# Altium PCB PCB.PcbDoc
Units mm, origin at the board's own origin, x right, y up, seen from the top; angles counter-clockwise.
Board outline 152.4 x 101.6 mm, 4 copper layers (Top Layer, L2 (GND), L3 (VCC), Bottom Layer), stack 1.55 mm thick; 107 components, 68 nets, 486 pads, 0 vias.
Unrouted connection lines stored in the file: 310.
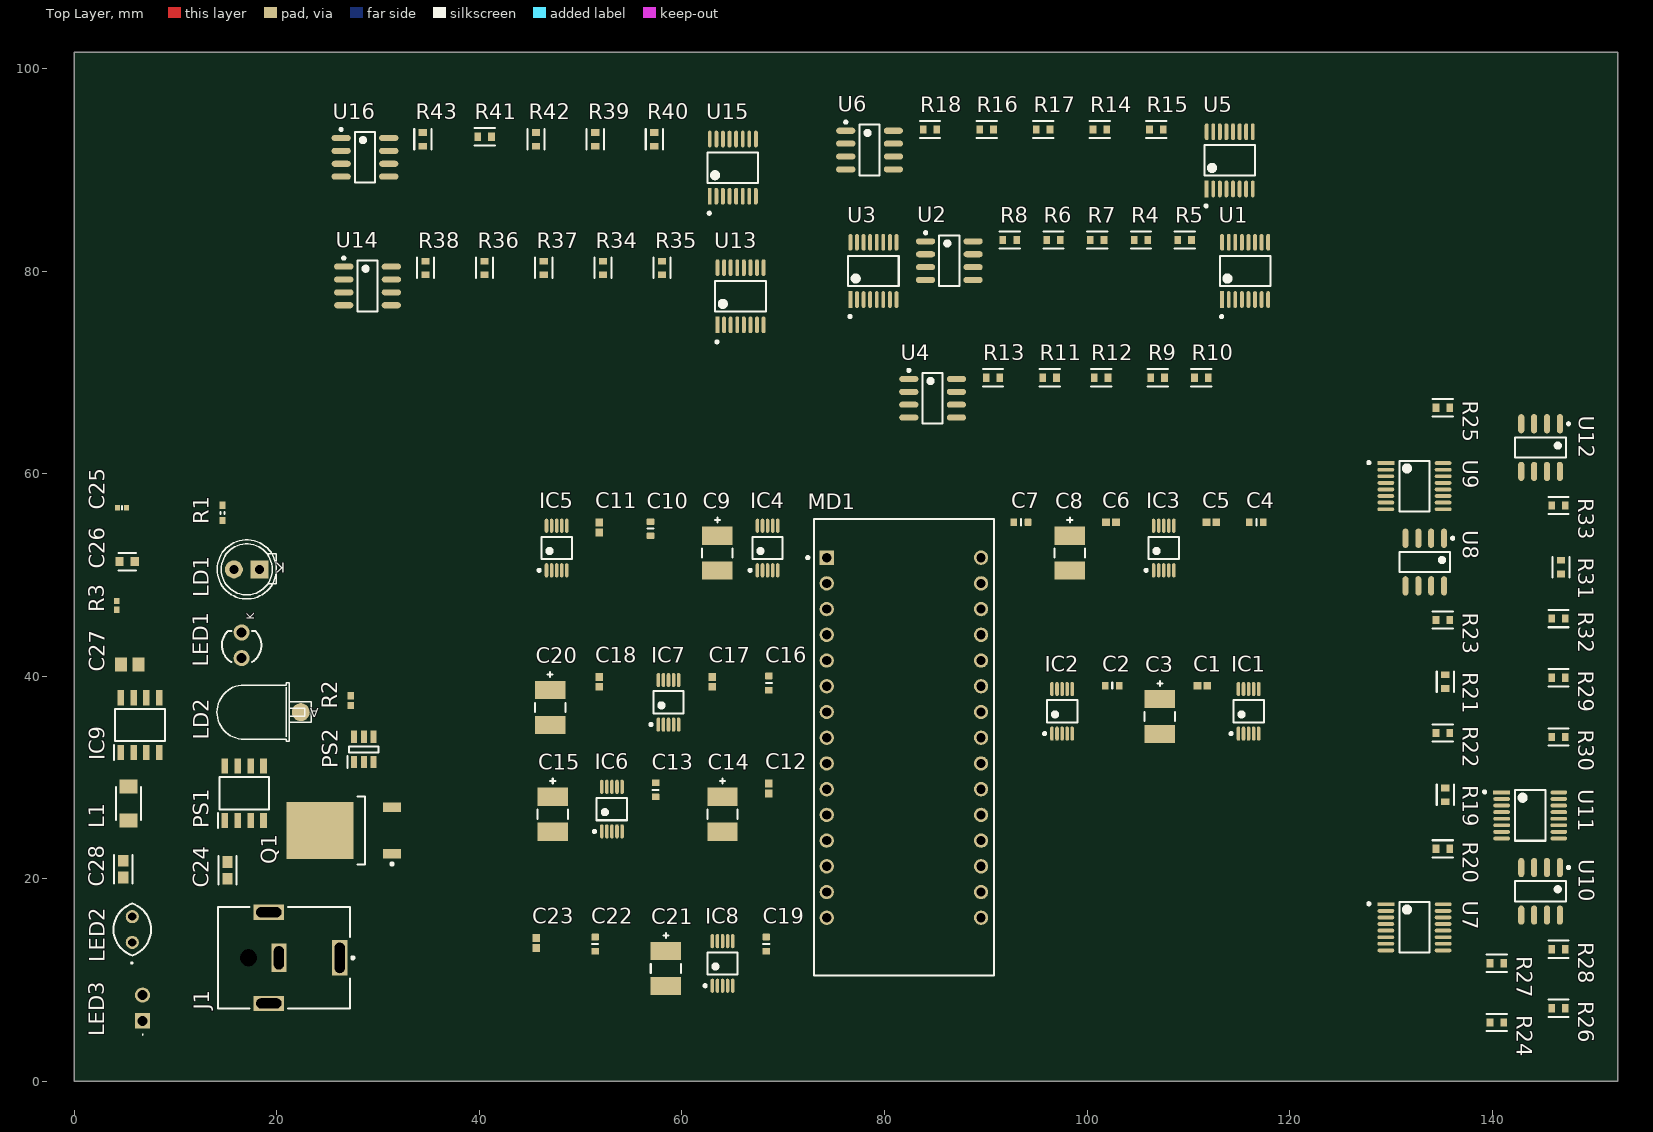
[diagram p0: Top Layer view]
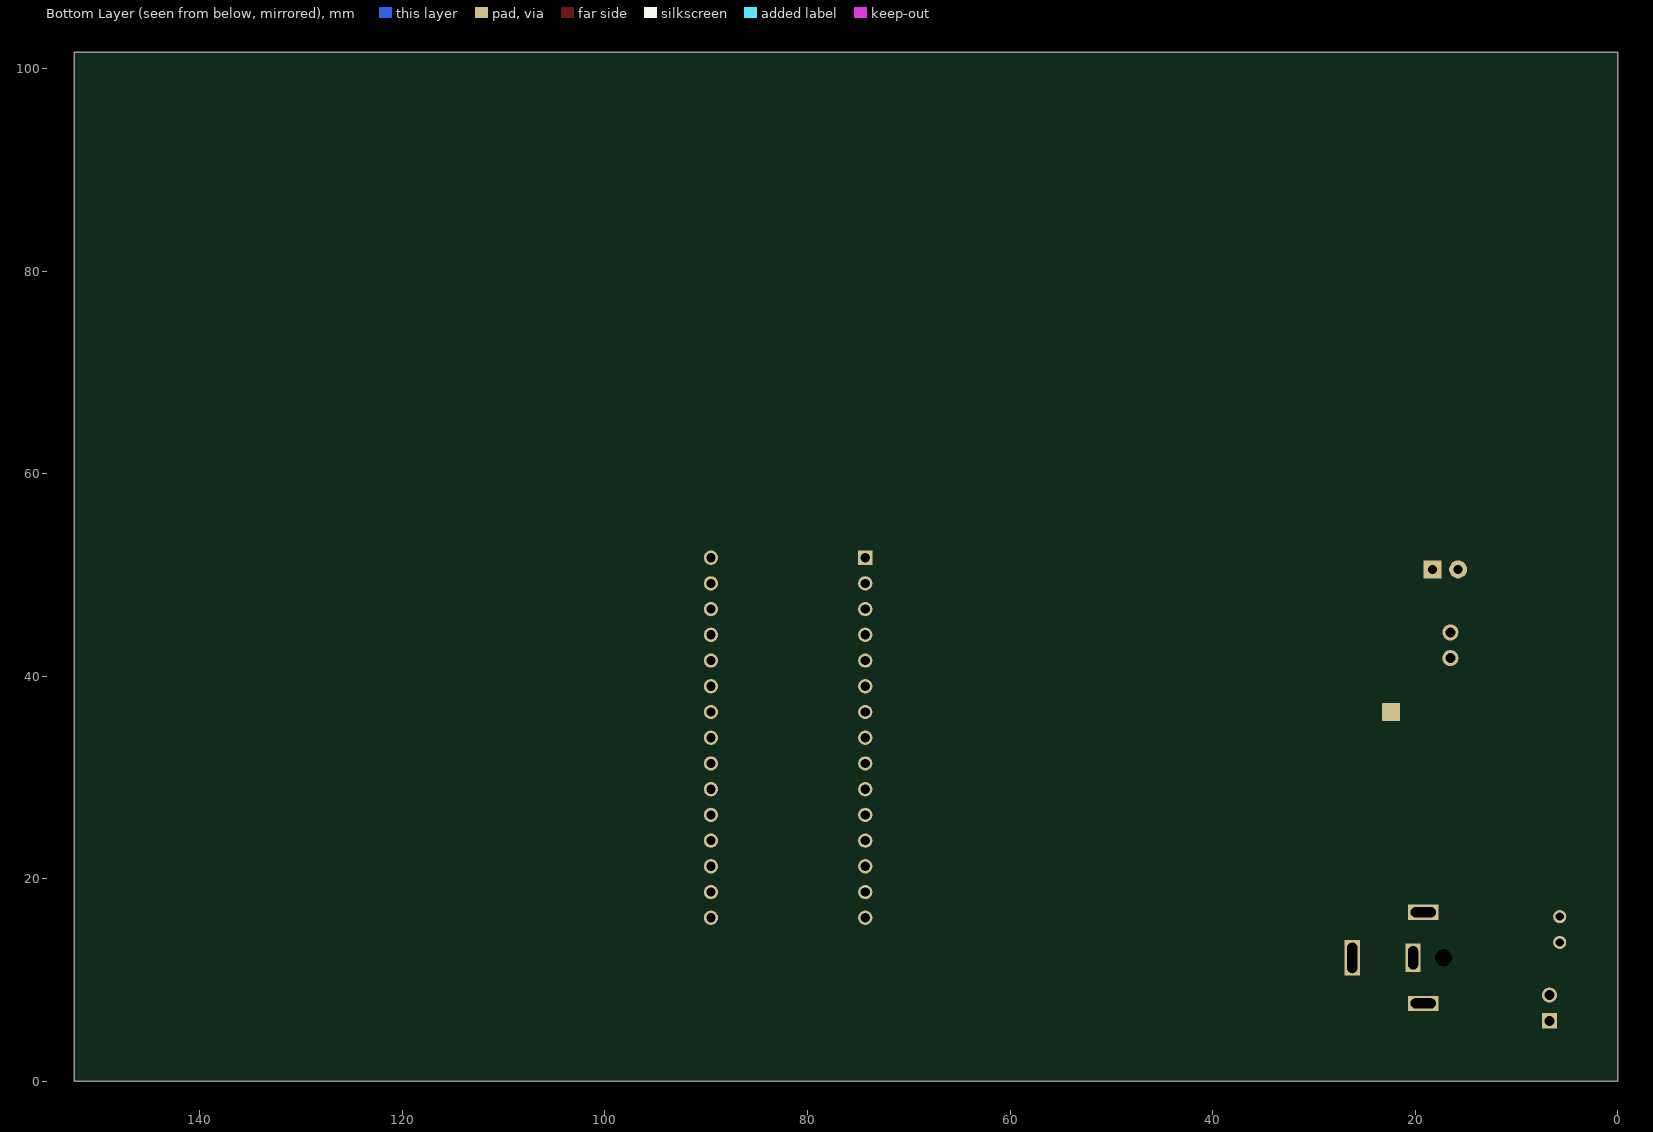
[diagram p1: Bottom Layer view, seen from below]

## Layer stack, top to bottom
Top Solder: solder mask 0.0254, Solder Resist, Dk 3.5
Top Layer: signal copper 0.035
Dielectric 1: prepreg 0.09, PP-017, Dk 4.3
L2 (GND): signal copper 0.0175
Dielectric 2: core 1.265, Core-039, Dk 4.8
L3 (VCC): signal copper 0.0175
Dielectric 3: prepreg 0.09, PP-017, Dk 4.3
Bottom Layer: signal copper 0.035
Bottom Solder: solder mask 0.0254, Solder Resist, Dk 3.5

## Board outline
0,0 152.4,0 152.4,101.6 0,101.6

## Design rules (kind name [scope] priority, off if disabled: settings)
Clearance [All] p1: gap=0.25 ignorepadtopadclearanceinfootprint=FALSE
ComponentClearance [All] p1: gap=0.254 collisioncheckmode=3 verticalgap=0.254 showdistances=TRUE
HoleSize [All] p1: absolutevalues=TRUE maxlimit=2.54 minlimit=0.25 maxpercent=80.000 minpercent=20.000
HoleToHoleClearance [All] p1: gap=0.406 allowstackedmicrovias=TRUE
MinimumAnnularRing [All] p1: minimumring=0.2
PolygonConnect [All] p1: connectstyle=Relief reliefconductorwidth=0.254 reliefentries=4 polygonreliefangle="90 Angle" airgapwidth=0.254
RoomDefinition "Weatstone bridge part III" [InComponentClass('Weatstone bridge part III')] p1: confinementstyle=ConfineIn formatcopy=TRUE lockcomponents=FALSE outline 25.146,70.993 69.85,70.993 69.85,96.943 25.146,96.943
RoomDefinition "Weatstone bridge part II" [InComponentClass('Weatstone bridge part II')] p2: confinementstyle=ConfineIn formatcopy=TRUE lockcomponents=FALSE outline 122.047,69.744 122.047,1.037 150.495,1.037 150.495,69.744
RoomDefinition "Weatstone bridge part I" [InComponentClass('Weatstone bridge part I')] p3: confinementstyle=ConfineIn formatcopy=TRUE lockcomponents=FALSE outline 74.972,61.595 119.38,61.595 119.38,97.663 74.972,97.663
RoomDefinition "Processing interface" [InComponentClass('Processing interface')] p4: confinementstyle=ConfineIn formatcopy=TRUE lockcomponents=FALSE outline 42.672,7.366 120.396,7.366 120.396,58.494 42.672,58.494
RoomDefinition "Power Supply Unit" [InComponentClass('Power Supply Unit')] p5: confinementstyle=ConfineIn formatcopy=TRUE lockcomponents=FALSE outline 41.033,3.931 41.033,67.431 1.028,67.431 1.028,3.931
RoutingVias [All] p1: holewidth=0.3 width=0.7 viastyle="Through Hole" minholewidth=0.3 minwidth=0.7 maxholewidth=0.3 maxwidth=0.7
SolderMaskExpansion [All] p1: expansion=0.102 istentingtop=FALSE
UnRoutedNet [All] p1: checkbadconnections=TRUE
Width [All] p1: maxlimit=0.5 minlimit=0.2 preferedwidth=0.2 minimp=50.000000 maximp=50.000000 favimp=50.000000
26 further rules are at their usual default settings.

## Classes and differential pairs
component class "Weatstone bridge part I": *3 R4 R5 R6 R7 R8 R9 R10 R11 R12 R13 R14 R15 R16 R17 R18 U1 U2 U3 U4 U5 U6
component class "Weatstone bridge part II": *4 R19 R20 R21 R22 R23 R24 R25 R26 R27 R28 R29 R30 R31 R32 R33 U7 U8 U9 U10 U11 U12
component class "Weatstone bridge part III": *5 R34 R35 R36 R37 R38 R39 R40 R41 R42 R43 U13 U14 U15 U16
component class "Processing interface": *5 C1 C2 C3 C4 C5 C6 C7 C8 C9 C10 C11 C12 C13 C14 C15 C16 C17 C18 C19 C20 C21 C22 C23 IC1 IC2 IC3 IC4 IC5 IC6 IC7 IC8 MD1
component class "Power Supply Unit": *2 C24 C25 C26 C27 C28 D2 IC9 J1 L1 LD1 LD2 LED1 LED2 LED3 PS1 PS2 Q1 R1 R2 R3 S2

## Components (designator, comment, footprint, x,y, rotation, side; value= is the part's Value field where it differs from the comment)
C1 "0402YC104KAT2A" CAPC1005X56X25ML10T15 111.379,39.063 r0 top
C2 "Capacitor 1µF +/-0.1% 25V 0603" CAPC0603(1608)100_L 102.489,39.063 r0 top value=1µF
C3 "293D106X9016B2TE3" FP-293D-B-MFG 107.188,36.015 r90 top value=10uF
C4 "Capacitor 1µF +/-0.1% 25V 0603" CAPC0603(1608)100_L 116.713,55.192 r0 top value=1µF
C5 "0402YC104KAT2A" CAPC1005X56X25ML10T15 112.268,55.192 r0 top
C6 "0402YC104KAT2A" CAPC1005X56X25ML10T15 102.362,55.192 r0 top
C7 "Capacitor 1µF +/-0.1% 25V 0603" CAPC0603(1608)100_L 93.472,55.192 r0 top value=1µF
C8 "293D106X9016B2TE3" FP-293D-B-MFG 98.298,52.144 r90 top value=10uF
C9 "293D106X9016B2TE3" FP-293D-B-MFG 63.5,52.144 r90 top value=10uF
C10 "Capacitor 1µF +/-0.1% 25V 0603" CAPC0603(1608)100_L 56.896,54.557 r90 top value=1µF
C11 "0402YC104KAT2A" CAPC1005X56X25ML10T15 51.816,54.684 r90 top
C12 "0402YC104KAT2A" CAPC1005X56X25ML10T15 68.58,28.903 r90 top
C13 "Capacitor 1µF +/-0.1% 25V 0603" CAPC0603(1608)100_L 57.404,28.776 r90 top value=1µF
C14 "293D106X9016B2TE3" FP-293D-B-MFG 64.008,26.363 r90 top value=10uF
C15 "293D106X9016B2TE3" FP-293D-B-MFG 47.244,26.363 r90 top value=10uF
C16 "Capacitor 1µF +/-0.1% 25V 0603" CAPC0603(1608)100_L 68.58,39.317 r90 top value=1µF
C17 "0402YC104KAT2A" CAPC1005X56X25ML10T15 62.992,39.444 r90 top
C18 "0402YC104KAT2A" CAPC1005X56X25ML10T15 51.816,39.444 r90 top
C19 "Capacitor 1µF +/-0.1% 25V 0603" CAPC0603(1608)100_L 68.326,13.536 r90 top value=1µF
C20 "293D106X9016B2TE3" FP-293D-B-MFG 46.99,36.904 r90 top value=10uF
C21 "293D106X9016B2TE3" FP-293D-B-MFG 58.42,11.123 r90 top value=10uF
C22 "Capacitor 1µF +/-0.1% 25V 0603" CAPC0603(1608)100_L 51.435,13.536 r90 top value=1µF
C23 "0402YC104KAT2A" CAPC1005X56X25ML10T15 45.593,13.663 r90 top
C24 "CL10A225KO8NNNC" FP-CL10-IPC_A 15.125,20.822 r90 top
C25 "Capacitor 220nF +/-20% 10V 0402" CAPC0402(1005)60_L 4.711,56.636 r180 top value=220nF
C26 "CC0603KRX7R9BB104" FP-CC0603-DA-MFG 5.219,51.302 r180 top value="100 nF"
C27 "Capacitor 10 uF +/- 10% 16 V 0805" CAPC2013X135X45NL10T25 5.473,41.142 r180 top value=10µF
C28 "CL10A225KO8NNNC" FP-CL10-IPC_A 4.838,20.949 r90 top
IC1 "MCP33141-10-E/MS" "New footprint 1" 115.824,36.523 r90 top
IC2 "MCP33141-10-E/MS" "New footprint 1" 97.409,36.523 r90 top
IC3 "MCP33141-10-E/MS" "New footprint 1" 107.442,52.652 r90 top
IC4 "MCP33141-10-E/MS" "New footprint 1" 68.326,52.652 r90 top
IC5 "MCP33141-10-E/MS" "New footprint 1" 47.498,52.652 r90 top
IC6 "MCP33141-10-E/MS" "New footprint 1" 52.959,26.871 r90 top
IC7 "MCP33141-10-E/MS" "New footprint 1" 58.547,37.412 r90 top
IC8 "MCP33141-10-E/MS" "New footprint 1" 63.881,11.631 r90 top
IC9 "MCP1501-18E/SN" SOIC127P600X175-8N 6.489,35.173 r90 top
J1 "PJ-063AH" CUI-PJ-063AH_V 20.205,12.186 r180 top
L1 "7447916" SMD-1210 5.346,27.426 r90 top
LD1 "5V Power Good" "LED 5mm V" 17.03,50.54 r90 top
LD2 "LED 5mm" "Led 5mm H-TB Pads-A On Top" 22.364,36.443 r180 top
LED1 "151033RS03000" "Type 3mm" 16.522,43.047 r90 top
LED2 "C5SMF-RJF-CT0W0BB2" 5-MM_OVAL_LED_1 5.727,14.98 r90 top
LED3 "151033RS03000" 151033RS03000 6.743,5.963 r90 top
MD1 "Arduino Nano BLE Sense Rev2" FP-A000005-MFG 81.915,32.967 r0 top
PS1 "MCP1501-33E/SN" SOIC127P600X175-8N 16.776,28.442 r90 top
PS2 "LMR50410YFQDBVRQ1" SOT95P280X145-6N 28.587,32.76 r90 top
Q1 "IPD90P03P4-04" INF-PG-TO252-3-11_N 26.619,24.759 r180 top
R1 "CRGH0603F3K3" CAPC1605X04N 14.617,56.128 r90 top value=3.3kR
R2 "RC0402FR-1322K1L" RESC1005X40X25ML05T10 27.317,37.586 r90 top
R3 "RC0402FR-0788K7L" RESC1005X40X25NL05T10 4.203,46.984 r90 top
R4 "RT0603BRD0710KL" FP-RT0603-IPC_C 105.325,83.058 r0 top value=10kR
R5 "RT0603BRD0710KL" FP-RT0603-IPC_C 109.643,83.058 r0 top value=10kR
R6 "RT0603BRD0710KL" FP-RT0603-IPC_C 96.689,83.058 r0 top value=10kR
R7 "RT0603BRD0710KL" FP-RT0603-IPC_C 101.007,83.058 r0 top value=10kR
R8 "RT0603BRD0710KL" FP-RT0603-IPC_C 92.371,83.058 r0 top value=10kR
R9 "RT0603BRD0710KL" FP-RT0603-IPC_C 106.976,69.469 r0 top value=10kR
R10 "RT0603BRD0710KL" FP-RT0603-IPC_C 111.294,69.469 r0 top value=10kR
R11 "RT0603BRD0710KL" FP-RT0603-IPC_C 96.308,69.469 r0 top value=10kR
R12 "RT0603BRD0710KL" FP-RT0603-IPC_C 101.388,69.469 r0 top value=10kR
R13 "RT0603BRD0710KL" FP-RT0603-IPC_C 90.72,69.469 r0 top value=10kR
R14 "RT0603BRD0710KL" FP-RT0603-IPC_C 101.261,93.98 r0 top value=10kR
R15 "RT0603BRD0710KL" FP-RT0603-IPC_C 106.849,93.98 r0 top value=10kR
R16 "RT0603BRD0710KL" FP-RT0603-IPC_C 90.085,93.98 r0 top value=10kR
R17 "RT0603BRD0710KL" FP-RT0603-IPC_C 95.673,93.98 r0 top value=10kR
R18 "RT0603BRD0710KL" FP-RT0603-IPC_C 84.497,93.98 r0 top value=10kR
R19 "RT0603BRD0710KL" FP-RT0603-IPC_C 135.382,28.279 r270 top value=10kR
R20 "RT0603BRD0710KL" FP-RT0603-IPC_C 135.128,22.945 r0 top value=10kR
R21 "RT0603BRD0710KL" FP-RT0603-IPC_C 135.382,39.455 r270 top value=10kR
R22 "RT0603BRD0710KL" FP-RT0603-IPC_C 135.128,34.375 r0 top value=10kR
R23 "RT0603BRD0710KL" FP-RT0603-IPC_C 135.128,45.551 r0 top value=10kR
R24 "RT0603BRD0710KL" FP-RT0603-IPC_C 140.462,5.8 r0 top value=10kR
R25 "RT0603BRD0710KL" FP-RT0603-IPC_C 135.128,66.506 r0 top value=10kR
R26 "RT0603BRD0710KL" FP-RT0603-IPC_C 146.558,7.197 r0 top value=10kR
R27 "RT0603BRD0710KL" FP-RT0603-IPC_C 140.462,11.642 r0 top value=10kR
R28 "RT0603BRD0710KL" FP-RT0603-IPC_C 146.558,13.039 r0 top value=10kR
R29 "RT0603BRD0710KL" FP-RT0603-IPC_C 146.558,39.836 r0 top value=10kR
R30 "RT0603BRD0710KL" FP-RT0603-IPC_C 146.558,33.994 r0 top value=10kR
R31 "RT0603BRD0710KL" FP-RT0603-IPC_C 146.812,50.758 r270 top value=10kR
R32 "RT0603BRD0710KL" FP-RT0603-IPC_C 146.558,45.678 r0 top value=10kR
R33 "RT0603BRD0710KL" FP-RT0603-IPC_C 146.558,56.854 r0 top value=10kR
R34 "RT0603BRD0710KL" FP-RT0603-IPC_C 52.197,80.306 r90 top value=10kR
R35 "RT0603BRD0710KL" FP-RT0603-IPC_C 58.039,80.306 r90 top value=10kR
R36 "RT0603BRD0710KL" FP-RT0603-IPC_C 40.513,80.306 r90 top value=10kR
R37 "RT0603BRD0710KL" FP-RT0603-IPC_C 46.355,80.306 r90 top value=10kR
R38 "RT0603BRD0710KL" FP-RT0603-IPC_C 34.671,80.306 r90 top value=10kR
R39 "RT0603BRD0710KL" FP-RT0603-IPC_C 51.435,93.006 r90 top value=10kR
R40 "RT0603BRD0710KL" FP-RT0603-IPC_C 57.277,93.006 r90 top value=10kR
R41 "RT0603BRD0710KL" FP-RT0603-IPC_C 40.513,93.26 r0 top value=10kR
R42 "RT0603BRD0710KL" FP-RT0603-IPC_C 45.593,93.006 r90 top value=10kR
R43 "RT0603BRD0710KL" FP-RT0603-IPC_C 34.417,93.006 r90 top value=10kR
U1 "TMUX1208PWR" FP-PW0016A-IPC_B 115.612,80.01 r90 top
U2 "MCP6N11-100E/SN" SOIC-SN8_L 86.402,81.026 r0 top
U3 "TMUX1208PWR" FP-PW0016A-IPC_B 78.909,80.01 r90 top
U4 "MCP6N11-100E/SN" SOIC-SN8_L 84.751,67.437 r0 top
U5 "TMUX1208PWR" FP-PW0016A-IPC_B 114.088,90.932 r90 top
U6 "MCP6N11-100E/SN" SOIC-SN8_L 78.528,91.948 r0 top
U7 "TMUX1208PWR" FP-PW0016A-IPC_B 132.334,15.198 r0 top
U8 "MCP6N11-100E/SN" SOIC-SN8_L 133.35,51.266 r270 top
U9 "TMUX1208PWR" FP-PW0016A-IPC_B 132.334,58.759 r0 top
U10 "MCP6N11-100E/SN" SOIC-SN8_L 144.78,18.754 r270 top
U11 "TMUX1208PWR" FP-PW0016A-IPC_B 143.764,26.247 r0 top
U12 "MCP6N11-100E/SN" SOIC-SN8_L 144.78,62.569 r270 top
U13 "TMUX1208PWR" FP-PW0016A-IPC_B 65.786,77.512 r90 top
U14 "MCP6N11-100E/SN" SOIC-SN8_L 28.956,78.528 r0 top
U15 "TMUX1208PWR" FP-PW0016A-IPC_B 65.024,90.212 r90 top
U16 "MCP6N11-100E/SN" SOIC-SN8_L 28.702,91.228 r0 top

## Footprints (in the part's own frame and the unit in brackets; to place one, negate y for a bottom-side part, rotate by r counter-clockwise, add the part's x,y. Pads: shape width x height; smd on the part's side, far side on the other; paste and mask are expansions set on the pad)
5-MM_OVAL_LED_1 [mm]
  round 1.3 hole 0.8: 1(-1.27,0) 2(1.27,0)
  silkscreen extent -3.37,-1.85 2.55,1.85
151033RS03000 [mm]
  rect 1.5x1.5 hole 1: 1(0,0)
  round 1.5 hole 1: 2(2.54,0)
  silkscreen extent -1.4,-0.05 -1.3,0.05, body extent -0.68,-1.95 3.22,1.95, height 11
CAPC0402(1005)60_L [mm] "Chip Capacitor, Body 1.0x0.5mm, Height 0.6mm, IPC High Density"
  rrect25% 0.5x0.55 smd: 1(-0.45,0) 2(0.45,0)
  silkscreen extent 0,-0.2 0,0.2, body extent -0.5,-0.25 0.5,0.25, height 0.6
CAPC0603(1608)100_L [mm] "Chip Capacitor, Body 1.6x0.8mm, Height 1.0mm, IPC High Density"
  rrect25% 0.66x0.76 smd: 1(-0.7,0) 2(0.7,0)
  silkscreen extent 0,-0.3 0,0.3, body extent -0.8,-0.4 0.8,0.4, height 0.95
CAPC1005X56X25ML10T15 [mm] "Chip Capacitor, 2-Leads, Body 1.00x0.50mm, IPC Low Density"
  rect 0.78x0.74 smd: 1(-0.49,0) 2(0.49,0)
  body extent -0.55,-0.3 0.55,0.3, height 0.56
CAPC1605X04N [mm] "Chip Capacitor, 2-Leads, Body 1,60x0,50mm, IPC Medium Density"
  rect 0.7x0.6 smd: 1(-0.75,0) 2(0.75,0)
  silkscreen extent -0.1,-0.2 0.1,0.2, body extent -0.85,-0.28 0.85,0.27, height 0.35
CAPC2013X135X45NL10T25 [mm] "Chip Capacitor, 2-Leads, Body 2.10x1.35mm, IPC Medium Density"
  rect 1.2x1.4 smd: 1(-0.85,0) 2(0.85,0)
  body extent -1.05,-0.67 1.05,0.67, height 1.35
CUI-PJ-063AH_V [mm] "THD, 2-Leads, Body 13x10mm, Height 9mm"
  rect 1.5x3.5 hole 1 slot 3 at 90 deg: 1(-6,0)
  rect 1.5x2.8 hole 1 slot 2.3 at 90 deg: 2(0,0)
  rect 3x1.5 hole 1 slot 2.5 at 0 deg: 3(1,4.5) 4(1,-4.5)
  round 1.4 hole 1.7 unplated: 5(3,0)
  silkscreen extent -7.42,-5 6,5, body extent -7,-5.15 6,5.15, height 9
FP-293D-B-MFG [mm]
  rect 1.8x3 smd paste+0 mask+0: 1(-1.725,0) 2(1.725,0)
  silkscreen extent -0.45,-1.5 3.52,1.5, body extent -2.73,-1.6 2.73,1.6, height 0.25
FP-A000005-MFG [mil]
  rect 55.67x55.67 hole 35.98 paste-39370.1 mask+0: 1(-300,737.5)
  round 55.67 hole 35.98 paste-39370.1 mask+0: 2(-300,637.5) 3(-300,537.5) 4(-300,437.5) 5(-300,337.5) 6(-300,237.5) 7(-300,137.5) 8(-300,37.5) 9(-300,-62.5) 10(-300,-162.5) 11(-300,-262.5) 12(-300,-362.5) 13(-300,-462.5) 14(-300,-562.5) 15(-300,-662.5) 16(300,-662.5) 17(300,-562.5) 18(300,-462.5) 19(300,-362.5) 20(300,-262.5) 21(300,-162.5) 22(300,-62.5) 23(300,37.5) 24(300,137.5) 25(300,237.5) 26(300,337.5) 27(300,437.5) 28(300,537.5) 29(300,637.5) 30(300,737.5)
  silkscreen extent -379,-888 350,888, body extent -354,-891 354,891, height 10
FP-CC0603-DA-MFG [mm]
  rect 0.8x0.9 smd paste+0 mask+0: 1(-0.75,0) 2(0.75,0)
  silkscreen extent -0.85,-0.85 0.85,0.85, body extent -1.35,-0.75 1.35,0.75, height 0.25
FP-CL10-IPC_A [mm]
  rect 1.158x1.012 smd paste+0 mask+0: 1(-0.827,0) 2(0.827,0)
  silkscreen extent -1.41,-0.91 1.41,0.91, body extent -1.91,-1.01 1.91,1.01, height 0.25
FP-PW0016A-IPC_B [mm]
  rect 1.655x0.381 smd paste+0 mask+0: 1(-2.825,2.275)
  rrect100% 1.655x0.381 smd paste+0 mask+0: 2(-2.825,1.625) 3(-2.825,0.975) 4(-2.825,0.325) 5(-2.825,-0.325) 6(-2.825,-0.975) 7(-2.825,-1.625) 8(-2.825,-2.275) 9(2.825,-2.275) 10(2.825,-1.625) 11(2.825,-0.975) 12(2.825,-0.325) 13(2.825,0.325) 14(2.825,0.975) 15(2.825,1.625) 16(2.825,2.275)
  silkscreen extent -4.63,-2.5 1.5,2.5, body extent -3.9,-2.75 3.9,2.75, height 0.25
FP-RT0603-IPC_C [mm]
  rect 0.659x0.812 smd paste+0 mask+0: 1(-0.677,0) 2(0.677,0)
  silkscreen extent -1.01,-0.85 1.01,0.85, body extent -1.11,-0.55 1.11,0.55, height 0.25
INF-PG-TO252-3-11_N [mm] "DPAK, 3-Leads, Body 6.5x6.12mm, Pitch 2.28mm, IPC Medium Density"
  rect 1.75x0.95 smd: 1(-4.75,2.28) 3(-4.75,-2.28)
  rect 6.6x5.6 smd: 2(2.35,0)
  silkscreen extent -4.87,-3.35 -1.35,3.43, body extent -2.1,-3.32 4.12,3.32, height 2.35
"Led 5mm H-TB Pads-A On Top" [mil] "Led 5mm H-TB Pads-A On Top"
  rect 70x70 smd far side: 1(0,0)
  rrect100% 70x70 smd: 2(0,0)
  silkscreen extent -40,-114 326,114, body extent -15,-115 329,115, height 114
"LED 5mm V" [mil] "LED 5mm V"
  round 70 hole 35.4: 1(0,50)
  rect 70x70 hole 35.4: 2(0,-50)
  silkscreen extent -115,-115 115,115, body extent -114,-115 115,115, height 285
"New footprint 1" [mm]
  oval 1.4x0.35 smd: 1(-2.2,0.873) 2(-2.2,0.373) 3(-2.2,-0.127) 4(-2.2,-0.627) 5(-2.2,-1.127) 6(2.2,-1.127) 7(2.2,-0.627) 8(2.2,-0.127) 9(2.2,0.373) 10(2.2,0.873)
  silkscreen extent -2.32,-1.63 1.1,1.72, body extent -2.45,-1.63 2.45,1.37, height 1.1
RESC1005X40X25ML05T10 [mm] "Chip Resistor, 2-Leads, Body 1.00x0.50mm, IPC Low Density"
  rect 0.7x0.65 smd: 1(-0.475,0) 2(0.475,0)
  body extent -0.53,-0.27 0.53,0.28, height 0.4
RESC1005X40X25NL05T10 [mm] "Chip Resistor, 2-Leads, Body 1.00x0.50mm, IPC Medium Density"
  rect 0.6x0.55 smd: 1(-0.425,0) 2(0.425,0)
  body extent -0.53,-0.27 0.53,0.28, height 0.4
SMD-1210 [mm] "Chip Inductor, 2-Leads, Body 3.2x2.5mm"
  rect 1.35x1.8 smd: 1(-1.675,0) 2(1.675,0)
  silkscreen extent -1.65,-1.25 1.65,1.25, body extent -1.6,-1.25 1.6,1.25, height 1.29
SOIC127P600X175-8N [mm]
  rect 1.5x0.65 smd: 1(-2.7,1.905) 2(-2.7,0.635) 3(-2.7,-0.635) 4(-2.7,-1.905) 5(2.7,-1.905) 6(2.7,-0.635) 7(2.7,0.635) 8(2.7,1.905)
  silkscreen extent -3.45,-2.45 1.6,2.58, body extent -3,-2.45 3,2.45, height 1.75
SOIC-SN8_L [mm] "SOIC, 8-Leads, Body 4.9x3.9mm, Pitch 1.27mm, IPC High Density"
  oval 1.9x0.6 smd: 1(-2.35,1.905) 2(-2.35,0.635) 3(-2.35,-0.635) 4(-2.35,-1.905) 5(2.35,-1.905) 6(2.35,-0.635) 7(2.35,0.635) 8(2.35,1.905)
  silkscreen extent -2.47,-2.5 1,2.88, body extent -2,-2.5 2,2.5, height 1.75
SOT95P280X145-6N [mm]
  rect 1.2x0.6 smd: 1(-1.25,0.95) 2(-1.25,0) 3(-1.25,-0.95) 4(1.25,-0.95) 5(1.25,0) 6(1.25,0.95)
  silkscreen extent -1.85,-1.45 0.3,1.6, body extent -1.4,-1.45 1.4,1.45, height 1.45
"Type 3mm" [mm] "THT, LED-3mm, 2pin- Body 4.15mm(max)"
  round 1.6 hole 1: 1(1.27,0) 2(-1.27,0)
  silkscreen extent -1.66,-1.95 1.4,1.95, body extent -1.93,-1.94 1.87,1.94, height 10.5

## Part data
C1 C5 C6 C11 C12 C17 C18 C23: library part CMP-2008-02800-1, Manufacturer="AVX Interconnect / Elco", Part Number=0402YC104KAT2A
C2 C4 C7 C10 C13 C16 C19 C22: library part CMP-001-00055-4, "Chip Capacitor, 1µF +/-0.1%, 25V, 0603, Thickness 1 mm", Case/Package=0603, Max Operating Temperature=85°C, Min Operating Temperature=-55°C, Tolerance=20%, Voltage Rating=25V, Mounting Technology=SMT, Pins=2
C3 C8 C9 C14 C15 C20 C21: library part CMP-001-00090-1, "Cap Tant Solid 10uF 16V B CASE 10% (3.5 X 2.8 X 1.9mm) Inward L SMD 3528-21 2 Ohm 125C T/R", Case Code (Imperial)=1411, Case Code (Metric)=3528, Dielectric Material=Tantalum, ESR (Equivalent Series Resistance)=2R, Leakage Current=1.6uA, Max Operating Temperature=125°C, Min Operating Temperature=-55°C, Package Quantity=2000, Ripple Current=160mA, Tolerance=10%, Voltage=16V, Case/Package=1411, Construction=Flat, Depth=2.8mm, Dissipation Factor=6%, Features="General Purpose", Height=1.9mm, Height - Seated (Max)=0.083inch, Lead Free="Lead Free", Length=3.5mm, Mounting Technology="Surface Mount,PCB", Packaging="Tape and Reel", Polarity=Polar, Q Factor=6, Radiation Hardening=No, RoHS Compliant=Yes, Series="TANTAMOUNT®, 293D", Termination=SMD/SMT, Voltage Rating=16V, Voltage Rating (DC)=16V, Width=1.9mm
C24 C28: library part CMP-13271-000835-1, "Cap Ceramic 2.2uF 16V X5R ±10% Pad SMD 0603 +85°C T/R", Capacitance=2.2uF, Case Code (Imperial)=0603, Case Code (Metric)=1608, Dielectric=X5R, Max Operating Temperature=85°C, Min Operating Temperature=-55°C, Package Quantity=4000, Tolerance=10%, Voltage=16V, Case/Package=0603, Contact Plating=Tin, Depth=0.8mm, Height=0.8mm, Lead Free="Lead Free", Length=1.6mm, Material=Ceramic, Mount="Surface Mount", Packaging="Tape and Reel", Radiation Hardening=No, Thickness=0.035inch, Voltage Rating=16V, Voltage Rating (DC)=16V, Width=0.031inch
C25: library part CMP-001-00057-3, "Chip Capacitor, 220nF +/-20%, 10V, 0402, Thickness 0.6 mm", Case/Package=0402, Max Operating Temperature=85°C, Min Operating Temperature=-55°C, Tolerance=10%, Voltage Rating=10V, Mounting Technology=SMT, Pins=2
C26: library part CMP-2100-03601-2, "CAP CER 0.1UF 50V X7R 0603", Capacitance="100 nF", Manufacturer=YAGEO, Package=CC0603-DA, Temperature="-55°C to +125°C", Temperature Characteristic=X7R, Temperature Coefficient=15%, Temperature Range High=+125°C, Temperature Range Low=-55°C, Tolerance=0.1, Voltage="50 V", Automotive=No, Category=Cap, ComponentLink2Description=Datasheet, ComponentLink2URL=http://www.yageo.com/documents/recent/UPY-GPHC_X7R_6.3V-to-50V_18.pdf, Device Class L1="Passive Components", Device Class L2=Capacitors, Device Class L3="Ceramic Capacitors", Digikey Description="CAP CER 0.1UF 50V X7R 0603", Footprint Url=http://www.yageo.com/exep/pages/download/literatures/UPY-C_GEN_24.pdf, Height=0.9mm, Lead Free=Yes, Manufacturer Part Number=CC0603KRX7R9BB104, Material=Ceramic, Mouser Description="Multilayer Ceramic Capacitor, CC Series, 0.1 - F, - 10%, X7R, 50 V, 0603 [1608 Metric]", Octopart=https://octopart.com/cc0603krx7r9bb104-yageo-42244635, RoHS=TRUE, Voltage Rating="50 V"
C27: library part CMP-001-00015-6, "Chip Capacitor, 10 uF, +/- 10%, 16 V, 0805 (2012 Metric)", Capacitor Type=Ceramic, Case/Package=0805, Max Operating Temperature=85°C, Min Operating Temperature=-55°C, Tolerance=10%, Voltage Rating=16V, Mounting Technology=SM, Pins=2, RoHS Compliant=True
IC1 IC2 IC3 IC4 IC5 IC6 IC7 IC8: library part CMP-020-00028-2, "ADC Single SAR 1Msps 12-bit Serial Microwire/SPI 10-Pin MSOP Tray"
IC9: library part MCP1501-18E_SN, "Integrated Circuit", Manufacturer_Name=Microchip, Mouser Part Number=579-MCP1501-18E/SN, Arrow Part Number=MCP1501-18E/SN, Arrow Price/Stock=https://www.arrow.com/en/products/mcp1501-18esn/microchip-technology?region=nac, Datasheet Link=http://ww1.microchip.com/downloads/en/DeviceDoc/20005474E.pdf, Height=1.75mm, Manufacturer_Part_Number=MCP1501-18E/SN, Mouser Price/Stock=https://www.mouser.co.uk/ProductDetail/Microchip-Technology-Atmel/MCP1501-18E-SN?qs=BA62vJVifGrqbCLW75KQyA%3D%3D
J1: library part CMP-2000-06898-1, "Through Hole Right Angle DC Power Jack, 8 A, 2 mm Center Pin, 2 Position, -25 to 85 degC, RoHS, Bulk", Current Rating=8A, Flammability Rating=UL94V-0, Insulation Resistance=100MOhms, Manufacturer=CUIInc., Operating Temperature Range=-25Cto+85C, Package Description="2-Pin Through Hole Device, Body 13 x 10 mm, Height 9 mm", Voltage Rating=24V, Brand=CUI, Connector Type=DCPowerJack, Contact Gender=Male, Contact Material=Copper, Contact Plating=Nickel, Datasheet URL=http://www.cui.com/product/resource/pj-063ah.pdf, Datasheet Version="Rev. 1.02, 03/2016", Factory Pack Quantity=500, Housing Material=PolybutyleneTerephthalate(PBT), Inside Contact Diameter=2mm, Manufacturer URL=http://www.cui.com/, Mounting Angle=Right, Mounting Style=KinkedPin, Mounting Technology=ThroughHole, Outside Contact Diameter=6.5mm, Package Reference=PJ-063AH, Product=Jacks, Product Category=DCPowerConnectors, RoHS=True, Termination Style=ThroughHole
L1: library part CMP-0221-00031-1, "SMD-Multilayer Inductor WE-MI, L = 4.70 µH", Inductance="4.70 ÂµH", ComponentLink1Description="Manufacturer Link", ComponentLink1URL=http://www.we-online.com, ComponentLink2Description=Datasheet, ComponentLink2URL=http://www.we-online.de/katalog/media/pdf/7447916.pdf, DatasheetVersion="ver 5, Oct-2004", PackageDescription="Chip Inductor, 2-Leads, Body 3.2 x 2.5 mm", PackageReference=SMD-1210, PackageVersion=2007
LD1: library part "LED 3mm Vertical", "Through Hole", Comment_1="LED 3mm Vertical", LatestRevisionDate=LED, LatestRevisionNote="Mech Layer 1 removed.", PackageDescription="LED; 2 Leads", PackageReference=LED-1, Published=8-Jun-2000, Publisher="Altium Limited"
LED1: library part CMP-1489-00004-1, "THT LED round mono-color waterclear, WL-TMRW, Red", Emitting color=Red, Manufacturer="Wuerth Elektronik", ComponentLink1Description="Manufacturer URL", ComponentLink1URL=http://www.we-online.com, ComponentLink2Description=Datasheet, ComponentLink2URL=http://katalog.we-online.de/pbs/datasheet/7448042001.pdfhttp://katalog.we-online.de/pbs/datasheet/7448042001.pdfhttp://katalog.we-online.de/pbs/datasheet/7448042001.pdfhttp://katalog.we-online.de/pbs/datasheet/151033RS03000.pdf, PackageReference="Type 3mm", PartNumber=151033RS03000
LED2: "LED", Manufacturer_Name=Wolfspeed, Mouser Part Number=941-C5SMFRJFCT0W0BB2, Arrow Part Number=C5SMF-RJF-CT0W0BB2, Arrow Price/Stock=https://www.arrow.com/en/products/c5smf-rjf-ct0w0bb2/cree-led?region=nac, Datasheet Link=https://www.cree.com/led-components/media/documents/C5SMF-RJF-RJE-GJF-GJE-BJF-BJE-1240.pdf, Manufacturer_Part_Number=C5SMF-RJF-CT0W0BB2, Mouser Price/Stock=https://www.mouser.co.uk/ProductDetail/Cree-LED/C5SMF-RJF-CT0W0BB2?qs=vnbNJPHmPnMRCSh39bwmBg%3D%3D
LED3: "LED", Manufacturer_Name="Wurth Elektronik", Mouser Part Number=710-151033RS03000, Datasheet Link=https://www.we-online.com/katalog/datasheet/151033RS03000.pdf, Height=10.9mm, Manufacturer_Part_Number=151033RS03000, Mouser Price/Stock=https://www.mouser.co.uk/ProductDetail/Wurth-Elektronik/151033RS03000?qs=LlUlMxKIyB1%252BAw6bWFN43w%3D%3D
MD1: library part CMP-189986-000002-1, "ARDUINO NANO ATMEGA328 EVAL BRD", Operating Supply Voltage=12V, Package Quantity=50, Core Architecture=AVR, Data Bus Width=8b, Evaluation Kit=Yes, Height=0.25inch, Interface=I2C, Length=7inch, Number of Bits=8, Packaging=Bulk, REACH SVHC="No SVHC", Series="AVR® ATmega", Weight=0.358383oz, Width=5inch
PS1: library part MCP1501-33E_SN, "Power Supply", Manufacturer_Name=Microchip, Mouser Part Number=579-MCP1501-33E/SN, Arrow Part Number=MCP1501-33E/SN, Arrow Price/Stock=https://www.arrow.com/en/products/mcp1501-33esn/microchip-technology?region=nac, Datasheet Link=http://www.farnell.com/datasheets/2158574.pdf, Height=1.75mm, Manufacturer_Part_Number=MCP1501-33E/SN, Mouser Price/Stock=https://www.mouser.co.uk/ProductDetail/Microchip-Technology-Atmel/MCP1501-33E-SN?qs=BA62vJVifGoOZffNI8tq9A%3D%3D
PS2: "Power Supply", Manufacturer_Name="Texas Instruments", Mouser Part Number=595-MR50410YFQDBVRQ1, Arrow Part Number=LMR50410YFQDBVRQ1, Arrow Price/Stock=https://www.arrow.com/en/products/lmr50410yfqdbvrq1/texas-instruments?region=nac, Datasheet Link=https://www.ti.com/product/LMR50410-Q1, Height=1.45mm, Manufacturer_Part_Number=LMR50410YFQDBVRQ1, Mouser Price/Stock=https://www.mouser.co.uk/ProductDetail/Texas-Instruments/LMR50410YFQDBVRQ1?qs=81r%252BiQLm7BRUAgUFqYZycA%3D%3D
Q1: library part CMP-013-00034-1, "Single P-Channel 30 V 4.5 mOhm 100 nC OptiMOS Power Mosfet - TO-252-3-11", Case/Package=TO-252-3, Continuous Drain Current (ID)=90A, Drain to Source Breakdown Voltage=30V, Drain to Source Resistance=4.5mR, Drain to Source Voltage (Vdss)=-30V, Gate to Source Voltage (Vgs)=20V, Input Capacitance=10.3nF, Max Operating Temperature=175°C, Max Power Dissipation=137W, Min Operating Temperature=-55°C, Package Quantity=1, Element Configuration=Single, Halogen Free="Halogen Free", Lead Free="Lead Free", Max Dual Supply Voltage=-30V, Packaging="Tape and Reel", Pins=3, Power Dissipation=137W, Rds On Max=4.5mR, Reach SVHC Compliant=Yes, RoHS Compliant=Yes, Series=OptiMOS™, Turn-Off Delay Time=70ns
R1: library part CMP-009-00182-1, "Res High Power Thick Film 0603 3.3k Ohm 1% 1/5W ±100ppm/°C Molded Paper T/R", Case Code (Imperial)=0603, Case Code (Metric)=1608, Number of Resistors=1, Power Rating=200mW, Resistance Tolerance=1%, Resistor Type="Thick Film,Power resistor", Temperature Coefficient=100ppm/°C, Voltage Rating=50V, Case/Package=0603, ELV=Compliant, Mounting Technology="Surface Mount", Number of Terminations=2, Packaging="Tape and Reel", Reach SVHC Compliant=Yes, RoHS Compliant=Yes, Termination=Solder, Tolerance=1%, Voltage Rating (DC)=50V
R2: library part CMP-2002-07868-1, Manufacturer="Yageo / Phycomp", Part Number=RC0402FR-1322K1L
R3: library part CMP-2002-07828-1, Manufacturer=Yageo, Part Number=RC0402FR-0788K7L
R4 R5 R6 R7 R8 R9 R10 R11 R12 R13 R14 R15 R16 R17 R18 R19 R20 R21 R22 R23 R24 R25 R26 R27 R28 R29 R30 R31 R32 R33 R34 R35 R36 R37 R38 R39 R40 R41 R42 R43: library part CMP-009-00178-1, "Res High precision Thin Film 0603 10K Ohm 0.1% 1/10W ±25ppm/°C Molded SMD Paper T/R", Case Code (Imperial)=0603, Case Code (Metric)=1608, Max Operating Temperature=155°C, Max Power Dissipation=100mW, Min Operating Temperature=-55°C, Package Quantity=5000, Resistor Type="Thin Film", Temperature Coefficient=25ppm/°C, Voltage Rating=75V, Case/Package=0603, Construction=Rectangular, Depth=0.8mm, Features="Moisture Resistant", Height=0.022inch, Lead Free="Lead Free", Length=0.063inch, Military Standard=Not, Number of Terminations=2, Packaging="Tape and Reel", Power Rating=100mW, RoHS Compliant=Yes, Series=RT, Technology="THIN FILM", Termination=SMD/SMT, Voltage Rating (DC)=75V, Weight=7.1E-05oz, Width=0.8mm, Working Voltage=75V
U1 U3 U5 U7 U9 U11 U13 U15: library part CMP-015-00012-1, "5-V, 8: 1, 1-channel general-purpose analog multiplexer with 1.8-V input logic 16-TSSOP -40 to 125", RoHS Compliant=Yes
U2 U4 U6 U8 U10 U12 U14 U16: library part CMP-014-00010-1, "MCP6N11 Series Single Channel 500 KHz 5.5 V Instrumentation Amplifier - SOIC-8", Case/Package=SOIC, Input Bias Current=10pA, Input Offset Voltage (Vos)=350uV, Max Operating Temperature=125°C, Max Supply Current=800uA, Max Supply Voltage=5.5V, Min Operating Temperature=-40°C, Min Supply Voltage=1.8V, Package Quantity=100, Power Supply Rejection Ratio (PSRR)=86dB, Bandwidth=500kHz, Common Mode Rejection Ratio=86dB, Gain Bandwidth Product=35MHz, Height=1.25mm, Input Offset Voltage-Max=350uV, Lead Free="Lead Free", Length=4.9mm, Mounting Technology="Surface Mount", Nominal Supply Current=800uA, Number of Amplifiers=1, Number of Channels=1, Number of Circuits=1, Number of Elements=2, Packaging=Rail/Tube, Pins=8, Radiation Hardening=No, Reach SVHC Compliant=Yes, RoHS Compliant=Yes, Slew Rate=6V/µs, Slew Rate-Nom=9V/µs, Supply Current=800uA, Unity Gain Bandwidth Product=35MHz, Width=3.9mm
LD2: Comment_1="LED 5mm", LatestRevisionDate=08-Jul-2005, LatestRevisionNote="Mech Layer 1 removed.", PackageDescription="LED; 2 Leads", PackageReference=LED-1, Published=8-Jun-2000, Publisher="Altium Limited"

## Nets (pads, with @x,y where several pads share a name; then routed paths per layer and width w, separated by ;. In a path a pad name is that pad's centre, name@x,y a point inside that pad or via, vN(x,y) a via of type N, cw(c..) or ccw(c..) an arc to the next point about the centre after c; other vN are vias at no path point)
D0: U1.15 U3.15 U5.15
D1: U1.16 U3.16 U5.16
D2: U1.1 U3.1 U5.1
D3: IC2.6 MD1.6
D4: IC4.6 MD1.7
D5: IC6.6 MD1.8
D6: IC8.6 MD1.9
D7: IC7.6 MD1.10
D8: IC5.6 MD1.11
D9: IC3.6 MD1.12
D10: IC1.6 MD1.13
GND: C1.1 C2.2 C3.1 C4.2 C5.1 C6.1 C7.2 C8.1 C9.1 C10.2 C11.1 C12.1 C13.2 C14.1 C15.1 C16.2 C17.1 C18.1 C19.2 C20.1 C21.1 C22.2 C23.1 C24.2 C25.2 C27.2 C28.2 IC1.4 IC1.5 IC2.4 IC2.5 IC3.4 IC3.5 IC4.4 IC4.5 IC5.4 IC5.5 IC6.4 IC6.5 IC7.4 IC7.5 IC8.4 IC8.5 IC9.2 IC9.4 IC9.5 IC9.6 J1.1 J1.3 J1.4 LD1.2 MD1.4 MD1.29 PS1.2 PS1.4 PS1.5 PS1.6 PS2.2 Q1.1 R2.2 R5.1 R7.2 R10.1 R12.2 R15.1 R17.2 R20.1 R22.2 R25.1 R27.2 R30.1 R32.2 R35.1 R37.2 R40.1 R42.2 U1.14 U2.1 U2.4 U3.14 U4.1 U4.4 U5.14 U6.1 U6.4 U7.14 U8.1 U8.4 U9.14 U10.1 U10.4 U11.14 U12.1 U12.4 U13.14 U14.1 U14.4 U15.14 U16.1 U16.4
MISO: IC1.7 IC2.7 IC3.7 IC4.7 IC5.7 IC6.7 IC7.7 IC8.7 MD1.15
MOSI: MD1.14
NetC1_2: C1.2 C5.2 C6.2 C11.2 C12.2 C17.2 C18.2 C23.2 IC1.9 IC1.10 IC2.9 IC2.10 IC3.9 IC3.10 IC4.9 IC4.10 IC5.9 IC5.10 IC6.9 IC6.10 IC7.9 IC7.10 IC8.9 IC8.10 MD1.3 MD1.28 MD1.30 R34.2 R39.2 U13.2 U13.13 U15.2 U15.13
NetC2_1: C2.1 C4.1 C7.1 C10.1 C13.1 C16.1 C19.1 C22.1 IC1.2 IC2.2 IC3.2 IC4.2 IC5.2 IC6.2 IC7.2 IC8.2 IC9.7 IC9.8
NetC3_2: C3.2 C8.2 C9.2 C14.2 C15.2 C20.2 C21.2 IC1.1 IC2.1 IC3.1 IC4.1 IC5.1 IC6.1 IC7.1 IC8.1 PS1.7 PS1.8 R6.1 R8.1 R11.1 R13.1 R16.1 R18.1 R21.1 R23.1 R26.1 R28.1 R31.1 R33.1 R36.1 R38.1 R41.1 R43.1
NetC24_1: C24.1 C27.1 C28.1 IC9.1 IC9.3 L1.2 PS1.1 PS1.3 R1.2 R3.1 R4.2 R9.2 R14.2 R19.2 R24.2 R29.2 U1.2 U1.13 U2.7 U2.8 U3.2 U3.13 U4.7 U4.8 U5.2 U5.13 U6.7 U6.8 U7.2 U7.13 U8.7 U8.8 U9.2 U9.13 U10.7 U10.8 U11.2 U11.13 U12.7 U12.8
NetC25_1: C25.1 PS2.4 PS2.5 Q1.2
NetC26_1: C26.1 L1.1 PS2.6
NetC26_2: C26.2 PS2.1
NetIC1_3: IC1.3 U16.6
NetIC2_3: IC2.3 U2.6
NetIC3_3: IC3.3 U14.6
NetIC4_3: IC4.3 U4.6
NetIC5_3: IC5.3 U12.6
NetIC6_3: IC6.3 U6.6
NetIC7_3: IC7.3 U10.6
NetIC8_3: IC8.3 U8.6
NetJ1_2: J1.2 Q1.3
NetLED2_1: LED2.1 LED3.1
NetLED2_2: LED2.2 LED3.2
NetPS2_3: PS2.3 R2.1 R3.2
NetR4_1: R4.1 R5.2 U2.5
NetR6_2: R6.2 R7.1
NetR8_2: R8.2 U2.3
NetR9_1: R9.1 R10.2 U4.5
NetR11_2: R11.2 R12.1
NetR13_2: R13.2 U4.3
NetR14_1: R14.1 R15.2 U6.5
NetR16_2: R16.2 R17.1
NetR18_2: R18.2 U6.3
NetR19_1: R19.1 R20.2 U8.5
NetR21_2: R21.2 R22.1
NetR23_2: R23.2 U8.3
NetR24_1: R24.1 R25.2 U10.5
NetR26_2: R26.2 R27.1
NetR28_2: R28.2 U10.3
NetR29_1: R29.1 R30.2 U12.5
NetR31_2: R31.2 R32.1
NetR33_2: R33.2 U12.3
NetR34_1: R34.1 R35.2 U14.5
NetR36_2: R36.2 R37.1
NetR38_2: R38.2 U14.3
NetR39_1: R39.1 R40.2 U16.5
NetR41_2: R41.2 R42.1
NetR43_2: R43.2 U16.3
NetU1_8: U1.8 U2.2
NetU3_8: U3.8 U4.2
NetU5_8: U5.8 U6.2
NetU7_8: U7.8 U8.2
NetU9_8: U9.8 U10.2
NetU11_8: U11.8 U12.2
NetU13_8: U13.8 U14.2
NetU14_7: U14.7 U14.8
NetU15_8: U15.8 U16.2
NetU16_7: U16.7 U16.8
SCLK: IC1.8 IC2.8 IC3.8 IC4.8 IC5.8 IC6.8 IC7.8 IC8.8 MD1.16
pads on no net: J1.5 LD1.1 LD2.1 LD2.2 LED1.1 LED1.2 MD1.1 MD1.2 MD1.5 MD1.17 MD1.18 MD1.19 MD1.20 MD1.21 MD1.22 MD1.23 MD1.24 MD1.25 MD1.26 MD1.27 R1.1 U1.3 U1.4 U1.5 U1.6 U1.7 U1.9 U1.10 U1.11 U1.12 U3.3 U3.4 U3.5 U3.6 U3.7 U3.9 U3.10 U3.11 U3.12 U5.3 U5.4 U5.5 U5.6 U5.7 U5.9 U5.10 U5.11 U5.12 U7.1 U7.3 U7.4 U7.5 U7.6 U7.7 U7.9 U7.10 U7.11 U7.12 U7.15 U7.16 U9.1 U9.3 U9.4 U9.5 U9.6 U9.7 U9.9 U9.10 U9.11 U9.12 U9.15 U9.16 U11.1 U11.3 U11.4 U11.5 U11.6 U11.7 U11.9 U11.10 U11.11 U11.12 U11.15 U11.16 U13.1 U13.3 U13.4 U13.5 U13.6 U13.7 U13.9 U13.10 U13.11 U13.12 U13.15 U13.16 U15.1 U15.3 U15.4 U15.5 U15.6 U15.7 U15.9 U15.10 U15.11 U15.12 U15.15 U15.16

## Text inside footprints (layer, text, board x,y; h text height)
LD1: Top Overlay "K" at 20.815,51.175 h1.02 r180
LD2: Top Overlay "A" at 24.142,36.824 h0.89 r180
LED1: Top Overlay "K" at 17.792,45.587 h0.76 r90; Mechanical 15 "K" at 17.792,45.587 h0.76 r90